# Altium PCB UZ_D_LEDebug.PcbDoc
Units mm, origin at the board's own origin, x right, y up, seen from the top; angles counter-clockwise.
Board outline 155.98 x 100 mm, 2 copper layers (Top Layer, Bottom Layer), stack 0.68 mm thick; 78 components, 87 nets, 255 pads, 99 vias.
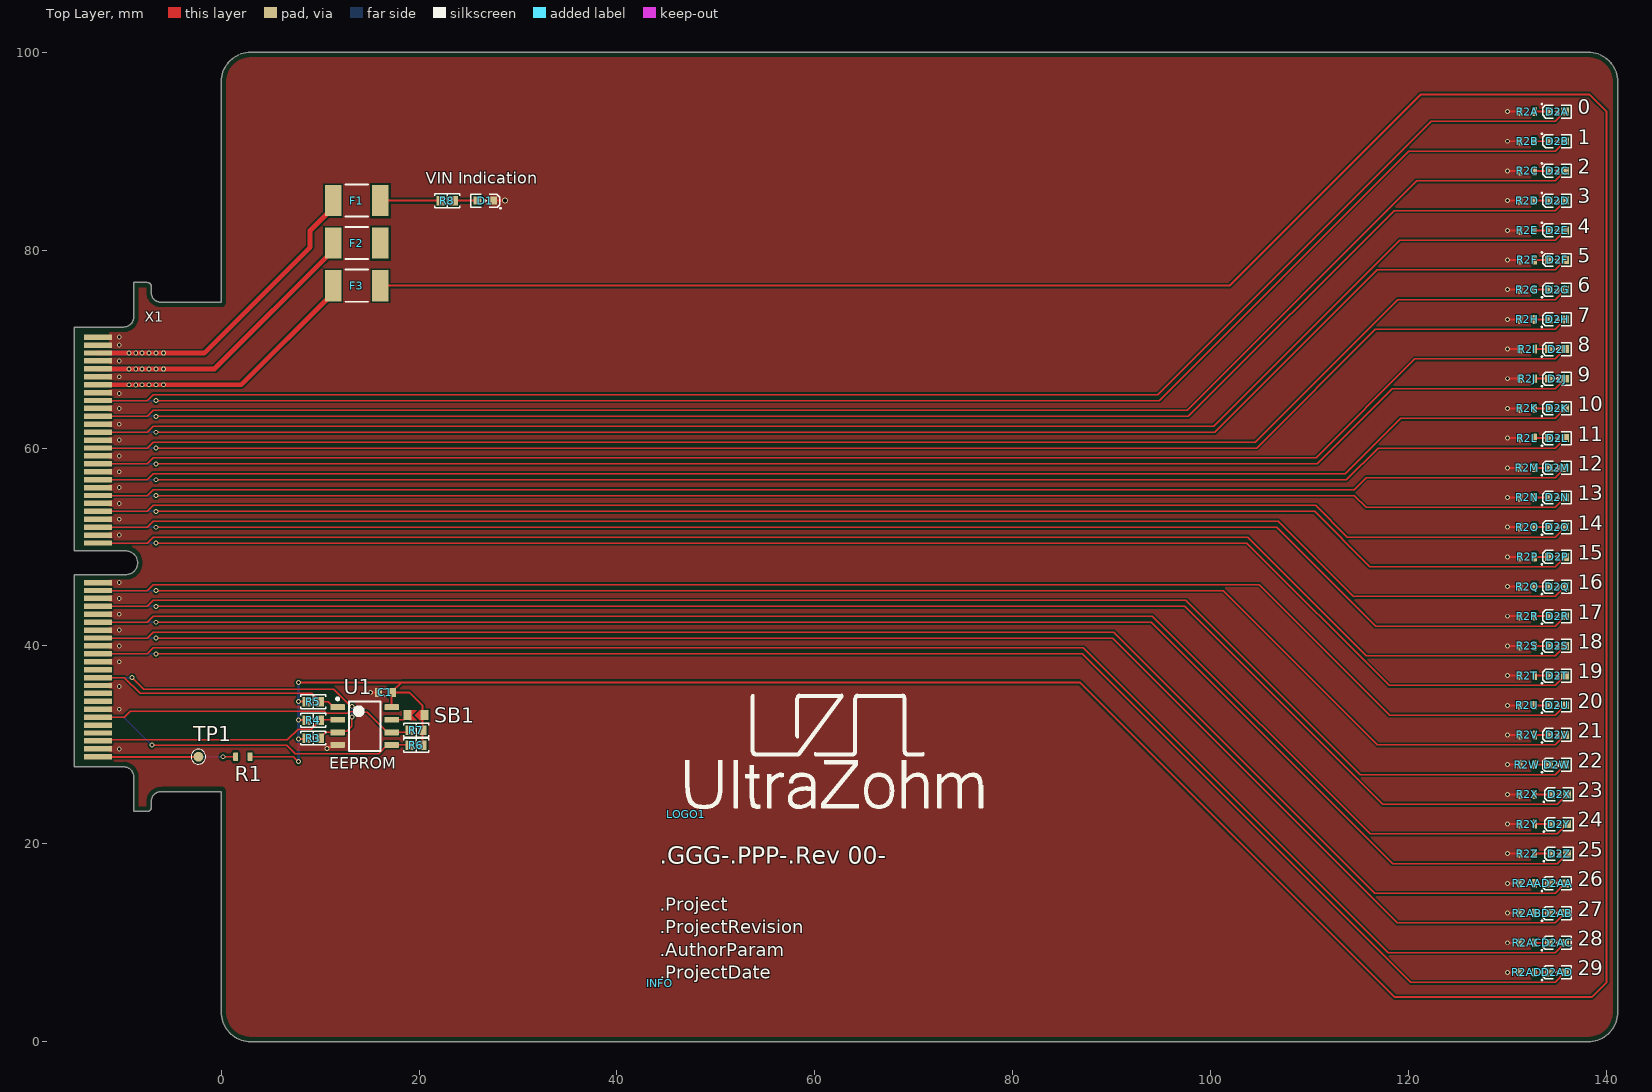
[diagram p0: Top Layer view]
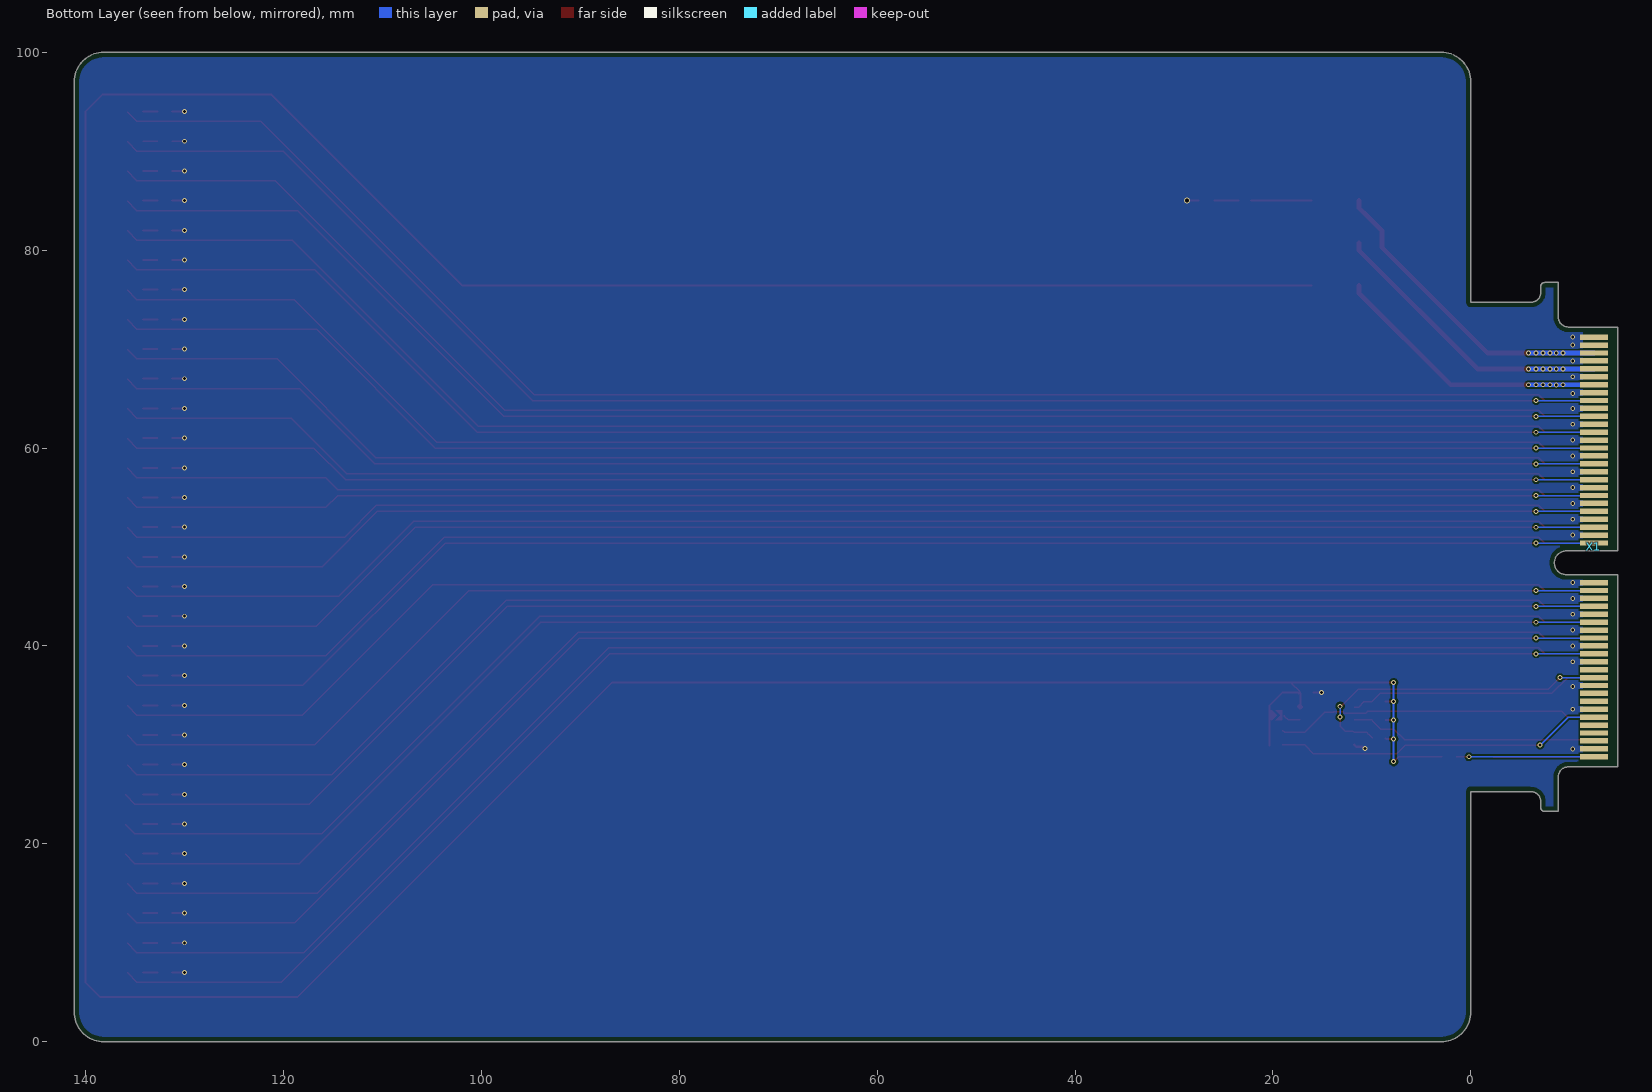
[diagram p1: Bottom Layer view, seen from below]
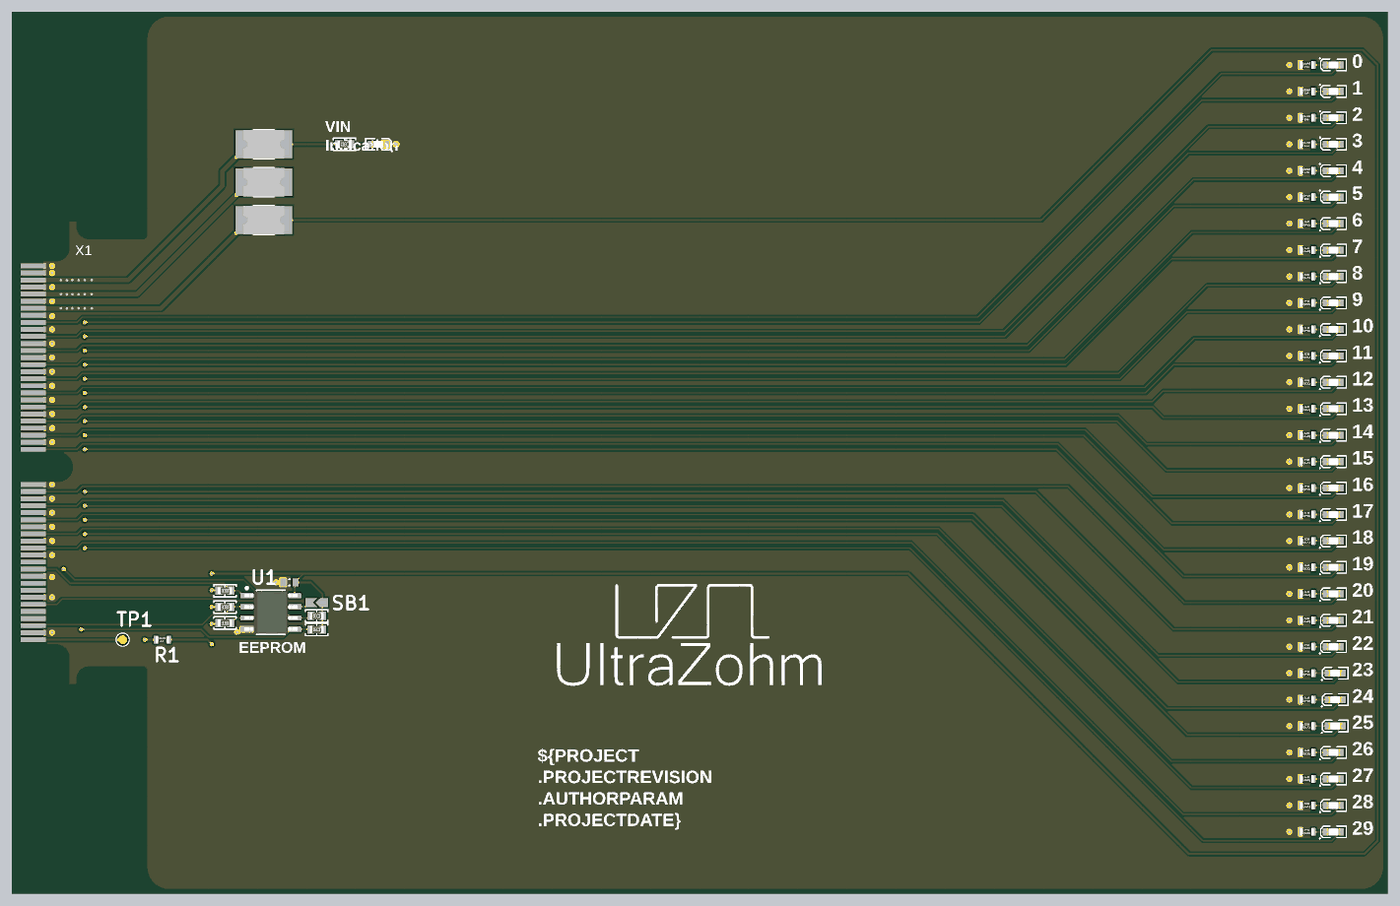
[diagram p2: 3D render of the assembled board from above, using the file's embedded part models]

## Layer stack, top to bottom
Top Solder: solder mask 0.01, Solder Resist, Dk 3.5
Top Layer: signal copper 0.035
Dielectric 2: prepreg 0.115, FR-4, Dk 4.4
Dielectric 1: core 0.38, Core-036, Dk 4.4
Dielectric 3: prepreg 0.115, FR-4, Dk 4.4
Bottom Layer: signal copper 0.035
Bottom Solder: solder mask 0.01, Solder Resist, Dk 3.5

## Board outline
-14.84,27.775 -9.84,27.775 cw(c-9.84,26.775) -8.84,26.775 -8.84,23.275 -7.46,23.275 ccw(c-7.46,23.675) -7.06,23.675 -7.06,24.275 cw(c-6.06,24.275) -6.06,25.275 0,25.275 0,3 ccw(c3,3) 3,0 138.141,0 ccw(c138.141,3) 141.141,3 141.141,97 ccw(c138.141,97) 138.141,100 3,100 ccw(c3,97) 0,97 0,74.725 -6.06,74.725 cw(c-6.06,75.725) -7.06,75.725 -7.06,76.325 ccw(c-7.46,76.325) -7.46,76.725 -8.84,76.725 -8.84,73.225 cw(c-9.84,73.225) -9.84,72.225 -14.84,72.225 -14.84,49.6 -9.64,49.6 cw(c-9.64,48.4) -9.64,47.2 -14.84,47.2

## Design rules (kind name [scope] priority, off if disabled: settings)
BoardOutlineClearance BoardOutlineClearance_TopOverlay [OnLayer('Top Overlay') or OnLayer('Bottom Overlay')] p1: gap=0 ignorepadtopadclearanceinfootprint=FALSE
BoardOutlineClearance [All] p2: gap=0.508 ignorepadtopadclearanceinfootprint=FALSE except(0: Arc-SplitContinuation Track-SplitContinuation SMDPad-SplitContinuation THPad-SplitContinuation Via-SplitContinuation Fill-SplitContinuation Poly-SplitContinuation Region-SplitContinuation Text-OutlineEdge Text-CavityEdge Text-CutoutEdge Text-SplitBarrior Text-SplitContinuation; 0.254: SMDPad-OutlineEdge SMDPad-CavityEdge SMDPad-CutoutEdge SMDPad-SplitBarrior)
Clearance [All] p1: gap=0.2 ignorepadtopadclearanceinfootprint=FALSE except(0: Arc-Text Track-Text SMDPad-Text THPad-Text Via-Text Fill-Text Poly-Text Region-Text Text-Text Text-Hole; 0.127: Arc-Arc Arc-Track Track-Track SMDPad-SMDPad; 0.5: THPad-THPad Via-Via)
ComponentClearance [All] p1: gap=0 collisioncheckmode=3 verticalgap=0 showdistances=FALSE
DiffPairsRouting [All] p1: maxlimit=0.127 minlimit=0.127 mostfreqgap=0.127 toplayer_minwidth=0.254 toplayer_maxwidth=0.254 toplayer_prefwidth=0.254 bottomlayer_minwidth=0.254 bottomlayer_maxwidth=0.254 bottomlayer_prefwidth=0.254 impedanceprofiledriven=TRUE impedanceprofileid={1E899714-F215-421E-BD83-15DB56C979E2} maxuncoupledlength=12.7
HoleSize [All] p1: absolutevalues=TRUE maxlimit=6.3 minlimit=0.2 maxpercent=80.000 minpercent=20.000
MatchedLengths [All] p1: tolerance=0.254 checknetsindiffpair=TRUE checkdiffpairvsdiffpair=FALSE checkxsignals=FALSE checkothers=FALSE
MinimumSolderMaskSliver [All] p1: minsoldermaskwidth=0.089
PlaneConnect [All] p1: pad.planeconnectstyle=Relief pad.reliefexpansion=0.508 pad.reliefentries=4 pad.reliefconductorwidth=0.254 pad.reliefairgap=0.254 via.planeconnectstyle=Direct via.reliefexpansion=0.508 via.reliefentries=4 via.reliefconductorwidth=0.254 via.reliefairgap=0.254
PolygonConnect PolygonConnect_GND [InNet('GND')] p1 off: thpad.connectstyle=Relief thpad.reliefconductorwidth=0.254 thpad.reliefentries=4 thpad.polygonreliefangle="90 Angle" thpad.airgapwidth=0.254 smdpad.connectstyle=Relief smdpad.reliefconductorwidth=0.254 smdpad.reliefentries=4 smdpad.polygonreliefangle="90 Angle" smdpad.airgapwidth=0.254 via.connectstyle=Direct via.reliefconductorwidth=0.254 via.reliefentries=4 via.polygonreliefangle="90 Angle" via.airgapwidth=0.254
PolygonConnect [All] p2: connectstyle=Direct reliefconductorwidth=0.254 reliefentries=4 polygonreliefangle="90 Angle" airgapwidth=0.127
RoomDefinition Component_LowerEdgeKeepOut [All] p1: confinementstyle=ConfineOut formatcopy=TRUE lockcomponents=FALSE outline 0,0 135.5,0 135.5,3 0,3
RoomDefinition Component_UpperEdgeKeepOut [All] p2: confinementstyle=ConfineOut formatcopy=TRUE lockcomponents=FALSE outline 0,97 135.5,97 135.5,100 0,100
RoutingVias [All] p1: holewidth=0.3 width=0.6 viastyle="Through Hole" minholewidth=0.2 minwidth=0.4 maxholewidth=0.8 maxwidth=1.6
SilkToSilkClearance [All] p1: silktosilkclearance=0
SilkToSolderMaskClearance [IsPad] p1: minsilkscreentomaskgap=0 clearancetoexposedcopper=TRUE
SolderMaskExpansion [All] p1: expansion=0.102 istentingtop=FALSE
SupplyNets "Schematic Supply Nets_6" [InNet('5V_PER')] p1: voltage=0.000
SupplyNets "Schematic Supply Nets_5" [InNet('5V')] p2: voltage=0.000
SupplyNets "Schematic Supply Nets_4" [InNet('3V3_PER')] p3: voltage=0.000
SupplyNets "Schematic Supply Nets_3" [InNet('GND')] p4: voltage=0.000
SupplyNets "Schematic Supply Nets_2" [InNet('VIN')] p5: voltage=0.000
SupplyNets "Schematic Supply Nets_1" [InNet('VIN_unfused')] p6: voltage=0.000
SupplyNets "Schematic Supply Nets" [InNet('3V3')] p7: voltage=0.000
Width width_s75 [InNetClass('S75')] p1 off: maxlimit=0.1 minlimit=0.1 preferedwidth=0.1 minimp=50.000000 maximp=50.000000 favimp=50.000000
Width [All] p2: maxlimit=10 minlimit=0.127 preferedwidth=0.254 minimp=50.000000 maximp=50.000000 favimp=50.000000
23 further rules are at their usual default settings.

## Classes and differential pairs
channel class LED: LEDA LEDAA LEDAB LEDAC LEDAD LEDB LEDC LEDD LEDE LEDF LEDG LEDH LEDI LEDJ LEDK LEDL LEDM LEDN LEDO LEDP LEDQ LEDR LEDS LEDT LEDU LEDV LEDW LEDX LEDY LEDZ
component class LEDZ: D2Z R2Z
component class LEDY: D2Y R2Y
component class LEDX: D2X R2X
component class LEDW: D2W R2W
component class LEDV: D2V R2V
component class LEDU: D2U R2U
component class LEDT: D2T R2T
component class LEDS: D2S R2S
component class LEDR: D2R R2R
component class LEDQ: D2Q R2Q
component class LEDP: D2P R2P
component class LEDO: D2O R2O
component class LEDN: D2N R2N
component class LEDM: D2M R2M
component class LEDL: D2L R2L
component class LEDK: D2K R2K
component class LEDJ: D2J R2J
component class LEDI: D2I R2I
component class LEDH: D2H R2H
component class LEDG: D2G R2G
component class LEDF: D2F R2F
component class LEDE: D2E R2E
component class LEDD: D2D R2D
component class LEDC: D2C R2C
component class LEDB: D2B R2B
component class LEDA: D2A R2A
component class LEDAD: D2AD R2AD
component class LEDAC: D2AC R2AC
component class LEDAB: D2AB R2AB
component class LEDAA: D2AA R2AA
component class X1: C1 D1 F1 F2 F3 R1 R3 R4 R5 R6 R7 R8 SB1 TP1 U1 X1

## Components (designator, comment, footprint, x,y, rotation, side; value= is the part's Value field where it differs from the comment)
C1 "100 nF" C_0603 16.6,35.297 r180 top
D1 "150060BS84000" WL-SMCW_0603 26.7,85 r180 top
D2A "LED Red" WL-SMCW_0603 135,94 r0 top (schematic designator D2)
D2AA "LED Red" WL-SMCW_0603 135,16 r0 top (schematic designator D2)
D2AB "LED Red" WL-SMCW_0603 135,13 r0 top (schematic designator D2)
D2AC "LED Red" WL-SMCW_0603 135,10 r0 top (schematic designator D2)
D2AD "LED Red" WL-SMCW_0603 135,7 r0 top (schematic designator D2)
D2B "LED Red" WL-SMCW_0603 135,91 r0 top (schematic designator D2)
D2C "LED Red" WL-SMCW_0603 135,88 r0 top (schematic designator D2)
D2D "LED Red" WL-SMCW_0603 135,85 r0 top (schematic designator D2)
D2E "LED Red" WL-SMCW_0603 135,82 r0 top (schematic designator D2)
D2F "LED Red" WL-SMCW_0603 135,79 r0 top (schematic designator D2)
D2G "LED Red" WL-SMCW_0603 135,76 r0 top (schematic designator D2)
D2H "LED Red" WL-SMCW_0603 135,73 r0 top (schematic designator D2)
D2I "LED Red" WL-SMCW_0603 135,70 r0 top (schematic designator D2)
D2J "LED Red" WL-SMCW_0603 135,67 r0 top (schematic designator D2)
D2K "LED Red" WL-SMCW_0603 135,64 r0 top (schematic designator D2)
D2L "LED Red" WL-SMCW_0603 135,61 r0 top (schematic designator D2)
D2M "LED Red" WL-SMCW_0603 135,58 r0 top (schematic designator D2)
D2N "LED Red" WL-SMCW_0603 135,55 r0 top (schematic designator D2)
D2O "LED Red" WL-SMCW_0603 135,52 r0 top (schematic designator D2)
D2P "LED Red" WL-SMCW_0603 135,49 r0 top (schematic designator D2)
D2Q "LED Red" WL-SMCW_0603 135,46 r0 top (schematic designator D2)
D2R "LED Red" WL-SMCW_0603 135,43 r0 top (schematic designator D2)
D2S "LED Red" WL-SMCW_0603 135,40 r0 top (schematic designator D2)
D2T "LED Red" WL-SMCW_0603 135,37 r0 top (schematic designator D2)
D2U "LED Red" WL-SMCW_0603 135,34 r0 top (schematic designator D2)
D2V "LED Red" WL-SMCW_0603 135,31 r0 top (schematic designator D2)
D2W "LED Red" WL-SMCW_0603 135,28 r0 top (schematic designator D2)
D2X "LED Red" WL-SMCW_0603 135.2,25 r0 top (schematic designator D2)
D2Y "LED Red" WL-SMCW_0603 135.2,22 r0 top (schematic designator D2)
D2Z "LED Red" WL-SMCW_0603 135.2,19 r0 top (schematic designator D2)
F1 "Littelfuse_PTC_1812" 1812_PTC_Polyfuse_Littelfuse 13.7,85 r0 top value="PTC, 1.1 A, 24V"
F2 "Littelfuse_PTC_1812" 1812_PTC_Polyfuse_Littelfuse 13.7,80.7 r0 top value="PTC, 1.1 A, 24V"
F3 "Littelfuse_PTC_1812" 1812_PTC_Polyfuse_Littelfuse 13.7,76.4 r0 top value="PTC, 1.1 A, 24V"
INFO "Design Information" Design_info 44.3,5.9 r0 top
LOGO1 "UZ Logo" UZ_Logo_small 47,23 r0 top
R1 "1k" R_0603_TE#1 2.2,28.8 r270 top
R2A "470R" R_0603_TE#1 132,94 r270 top (schematic designator R2)
R2AA "470R" R_0603_TE#2 132,16 r90 top (schematic designator R2)
R2AB "470R" R_0603_TE#2 132,13 r90 top (schematic designator R2)
R2AC "470R" R_0603_TE#2 132,10 r90 top (schematic designator R2)
R2AD "470R" R_0603_TE#2 132,7 r90 top (schematic designator R2)
R2B "470R" R_0603_TE#1 132,91 r270 top (schematic designator R2)
R2C "470R" R_0603_TE#1 132,88 r270 top (schematic designator R2)
R2D "470R" R_0603_TE#1 132,85 r270 top (schematic designator R2)
R2E "470R" R_0603_TE#1 132,82 r270 top (schematic designator R2)
R2F "470R" R_0603_TE#1 132,79 r270 top (schematic designator R2)
R2G "470R" R_0603_TE#2 132,76 r90 top (schematic designator R2)
R2H "470R" R_0603_TE#2 132,73 r90 top (schematic designator R2)
R2I "470R" R_0603_TE#2 132,70 r90 top (schematic designator R2)
R2J "470R" R_0603_TE#2 132,67 r90 top (schematic designator R2)
R2K "470R" R_0603_TE#2 132,64 r90 top (schematic designator R2)
R2L "470R" R_0603_TE#2 132,61 r90 top (schematic designator R2)
R2M "470R" R_0603_TE#2 132,58 r90 top (schematic designator R2)
R2N "470R" R_0603_TE#2 132,55 r90 top (schematic designator R2)
R2O "470R" R_0603_TE#2 132,52 r90 top (schematic designator R2)
R2P "470R" R_0603_TE#2 132,49 r90 top (schematic designator R2)
R2Q "470R" R_0603_TE#2 132,46 r90 top (schematic designator R2)
R2R "470R" R_0603_TE#2 132,43 r90 top (schematic designator R2)
R2S "470R" R_0603_TE#2 132,40 r90 top (schematic designator R2)
R2T "470R" R_0603_TE#2 132,37 r90 top (schematic designator R2)
R2U "470R" R_0603_TE#2 132,34 r90 top (schematic designator R2)
R2V "470R" R_0603_TE#2 132,31 r90 top (schematic designator R2)
R2W "470R" R_0603_TE#2 132,28 r90 top (schematic designator R2)
R2X "470R" R_0603_TE#2 132,25 r90 top (schematic designator R2)
R2Y "470R" R_0603_TE#2 132,22 r90 top (schematic designator R2)
R2Z "470R" R_0603_TE#2 132,19 r90 top (schematic designator R2)
R3 "4k7" "RES 0603_1608" 9.3,30.688 r180 top
R4 "4k7" "RES 0603_1608" 9.3,32.497 r180 top
R5 "4k7" "RES 0603_1608" 9.3,34.347 r180 top
R6 "100k" "RES 0603_1608" 19.7,29.958 r0 top
R7 "100k" "RES 0603_1608" 19.7,31.488 r0 top
R8 "24k9" "RES 0603_1608" 22.85,85 r180 top
SB1 "Solder Bump 0603" SB_0603 19.7,33.005 r0 top
TP1 "Testpoint 1mm" TP_1mm -2.3,28.8 r90 top
U1 "M24C02-WMN6TP" D0008A_N 14.5,31.9 r0 top
X1 "HSEC8-150-01-XX-DV-A-BL-CARD" HSEC8-150-01-XX-DV-A-BL-CARD -14.84,50 r270 bottom locked

## Footprints (in the part's own frame and the unit in brackets; to place one, negate y for a bottom-side part, rotate by r counter-clockwise, add the part's x,y. Pads: shape width x height; smd on the part's side, far side on the other; paste and mask are expansions set on the pad)
1812_PTC_Polyfuse_Littelfuse [mm] "Chip Fuse, 2-Leads, Body 4.6x3.24mm"
  rect 1.68x3.14 smd: 1(-2.39,0) 2(2.39,0)
  silkscreen extent -1.15,-1.62 1.15,1.62, body extent -2.3,-1.62 2.3,1.62, height 1.15
C_0603 [mm] "Chip Capacitor, Body 1.6x0.8mm, Height 1.0mm, IPC High Density"
  rect 0.7x0.9 smd: 1(-0.7,0) 2(0.7,0)
  silkscreen extent -0.05,-0.35 0.05,0.35, body extent -0.87,-0.47 0.88,0.48, height 1
D0008A_N [mm] "SOIC, 8-Leads, Body 5x4mm, Pitch 1.27mm, IPC Medium Density"
  rrect17% 1.45x0.6 smd: 1(-2.725,1.905) 2(-2.725,0.635) 3(-2.725,-0.635) 4(-2.725,-1.905) 5(2.725,-1.905) 6(2.725,-0.635) 7(2.725,0.635) 8(2.725,1.905)
  silkscreen extent -2.85,-2.5 1.6,2.88, body extent -3,-2.45 3,2.45, height 1.63
Design_info [mm] "Design information about the PCB"
HSEC8-150-01-XX-DV-A-BL-CARD [mm]
  rect 0.55x2.8 smd far side mask+0.05: 1(-21.2,-2.4) 3(-20.4,-2.4) 5(-19.6,-2.4) 7(-18.8,-2.4) 9(-18,-2.4) 11(-17.2,-2.4) 13(-16.4,-2.4) 15(-15.6,-2.4) 17(-14.8,-2.4) 19(-14,-2.4) 21(-13.2,-2.4) 23(-12.4,-2.4) 25(-11.6,-2.4) 27(-10.8,-2.4) 29(-10,-2.4) 31(-9.2,-2.4) 33(-8.4,-2.4) 35(-7.6,-2.4) 37(-6.8,-2.4) 39(-6,-2.4) 41(-5.2,-2.4) 43(-4.4,-2.4) 45(-3.6,-2.4) 47(-2.8,-2.4) 49(-2,-2.4) 51(-1.2,-2.4) 53(-0.4,-2.4) 55(3.6,-2.4) 57(4.4,-2.4) 59(5.2,-2.4) 61(6,-2.4) 63(6.8,-2.4) 65(7.6,-2.4) 67(8.4,-2.4) 69(9.2,-2.4) 71(10,-2.4) 73(10.8,-2.4) 75(11.6,-2.4) 77(12.4,-2.4) 79(13.2,-2.4) 81(14,-2.4) 83(14.8,-2.4) 85(15.6,-2.4) 87(16.4,-2.4) 89(17.2,-2.4) 91(18,-2.4) 93(18.8,-2.4) 95(19.6,-2.4) 97(20.4,-2.4) 99(21.2,-2.4)
  rect 0.55x2.8 smd mask+0.05: 2(-21.2,-2.4) 4(-20.4,-2.4) 6(-19.6,-2.4) 8(-18.8,-2.4) 10(-18,-2.4) 12(-17.2,-2.4) 14(-16.4,-2.4) 16(-15.6,-2.4) 18(-14.8,-2.4) 20(-14,-2.4) 22(-13.2,-2.4) 24(-12.4,-2.4) 26(-11.6,-2.4) 28(-10.8,-2.4) 30(-10,-2.4) 32(-9.2,-2.4) 34(-8.4,-2.4) 36(-7.6,-2.4) 38(-6.8,-2.4) 40(-6,-2.4) 42(-5.2,-2.4) 44(-4.4,-2.4) 46(-3.6,-2.4) 48(-2.8,-2.4) 50(-2,-2.4) 52(-1.2,-2.4) 54(-0.4,-2.4) 56(3.6,-2.4) 58(4.4,-2.4) 60(5.2,-2.4) 62(6,-2.4) 64(6.8,-2.4) 66(7.6,-2.4) 68(8.4,-2.4) 70(9.2,-2.4) 72(10,-2.4) 74(10.8,-2.4) 76(11.6,-2.4) 78(12.4,-2.4) 80(13.2,-2.4) 82(14,-2.4) 84(14.8,-2.4) 86(15.6,-2.4) 88(16.4,-2.4) 90(17.2,-2.4) 92(18,-2.4) 94(18.8,-2.4) 96(19.6,-2.4) 98(20.4,-2.4) 100(21.2,-2.4)
R_0603_TE#1 [mm] "Vishay D0603 1.55 x 0.85 (+0.1/-0.05) 0.3 +/- 0,2mm Kontakte"
  rrect33% 0.9x0.5 smd: 1(0,0.73) 2(0,-0.73)
  body extent -0.42,-0.78 0.43,0.77, height 0.45
R_0603_TE#2 [mm] "Vishay D0603 1.55 x 0.85 (+0.1/-0.05) 0.3 +/- 0,2mm Kontakte"
  rrect33% 0.9x0.5 smd: 1(0,-0.73) 2(0,0.73)
  body extent -0.42,-0.77 0.43,0.78, height 0.45
"RES 0603_1608" [mm] "Chip Resistor, 2-Leads, Body 1.60x0.80mm, IPC Medium Density"
  rect 0.85x0.95 smd: 1(-0.65,0) 2(0.65,0)
  silkscreen extent -1.27,-0.7 1.27,0.7, body extent -0.8,-0.4 0.8,0.4, height 0.45
SB_0603 [mil] "Solder Bump"
  rect 32x40 smd: 1(33.75,0) 2(-33.75,0)
  Top Layer region: -26.25,0 -17.25,0 2.75,-20 -26.25,-20
  Top Layer region: -26.25,0 -17.25,0 2.75,20 -26.25,20
  Top Layer region: 23.75,20 14.75,20 -5.25,0 14.75,-20 23.75,-20
TP_1mm [mm]
  round 1 smd paste-1: 1(0,0)
  silkscreen extent -0.75,-0.75 0.75,0.75
UZ_Logo_small [mm] "logo width 3cm"
  silkscreen extent -0.05,0.57 29.94,12.12
WL-SMCW_0603 [mm] "SMD Mono-color Chip LED, body 1.6x0.8mm"
  rect 0.8x0.8 smd: 1(-0.8,0) 2(0.8,0)
  silkscreen extent -1.59,-0.65 1.45,0.83, body extent -0.8,-0.4 0.8,0.4, height 0.7

## Part data
C1: library part C0603C104K9PACTU, "Capacitor 0603, 6.3 VDC, 100 nF, X5R", Device Package=0603, Manufacturer=KEMET, Operating Temperature="-55 - 85°C", Supplier Part Number 1=80-C0603C104K9P, Tolerance="10 %", Voltage Rating="6.3 VDC", Component Type="Capacitor 0603", ComponentLink1Description=Datasheet, ComponentLink1URL=https://www.mouser.de/datasheet/2/212/KEM_C1006_X5R_SMD-1103249.pdf, Created from=MGremer, Created On="20.12.2020 13:54:13", Last Updated="20.01.2021 13:57:36", Live Cycle Status=1, Manufacturer Part Number=C0603C104K9PACTU, Mounting Type=SMD, PartID=70, Series="SMD Comm X5R", Stock number="not stored", Supplier 1=Mouser, Type=Capacitor
D1: "WL-SMCW SMD Mono-color Chip LED Waterclear Blue", Color=blue, Device Package=0603, Forward Current I_f="20 mA", Forward Voltage U_f="3.2 V", Manufacturer="Wuerth Elektronik", Nominal Power="78 mW", Operating Temperature="-40 - 85 °C", Supplier Part Number 1=710-150060BS84000, Component Type="LED Diode", ComponentLink1Description=Datasheet, ComponentLink1URL=https://www.mouser.de/datasheet/2/445/150060BS84000-1838909.pdf, Created from=MGremer, Created On="08.12.2020 10:19:38", Last Updated="03.03.2021 09:59:51", Light Intensity="560 mcd", Live Cycle Status=1, Manufacturer Part Number=150060BS84000, Mounting Type=SMD, PartID=1, Stock number="not stored", Supplier 1=Mouser, Supplier 2=Farnell, Supplier 3=Digi-Key, Supplier Part Number 2=3408611, Supplier Part Number 3=732-150060BS84000CT-ND, Type=Standard, Wavelength="470 nm"
D2A D2AA D2AB D2AC D2AD D2B D2C D2D D2E D2F D2G D2H D2I D2J D2K D2L D2M D2N D2O D2P D2Q D2R D2S D2T D2U D2V D2W D2X D2Y D2Z: library part UZgen_LED_0603_Red, "Standard LEDs - SMD 0603 red", Color=red, Device Package=0603, Manufacturer=UZgen, Supplier Part Number 1='', Component Type="LED Diode", ComponentLink1Description=N/A, ComponentLink1URL=N/A, Created from=UZgenTool, Created On="09/09/2024 10:45:01", Last Updated="09/09/2024 10:45:01", Live Cycle Status=1, Manufacturer Part Number=UZgen_LED_0603_Red, Mounting Type=SMD, PartID=22, Stock number="not stored", Supplier 1=LCSC, Type=Standard
F1 F2 F3: "POLYSWITCH RESETTABLE DEVICES", Hold Current=1.1A, LCSC Part Number=C70119, Manufacturer=Littelfuse, MPN=miniASMDC110F/24, Nominal current="1 A", Operating Temperature="-40 - 85 °C", Package=1812, Resistance="0.18 Ohm", Supplier Part Number 1=530-0ZCG0150BF2C, Trip Current=2.2A, Voltage=24V, Component Type=Littelfuse_PTC_1812, ComponentLink1Description=Datasheet, ComponentLink1URL=https://www.littelfuse.com/~/media/electronics/datasheets/resettable_ptcs/littelfuse_ptc_surface_mount_catalog_datasheet.pdf.pdf, Created=2019_02_10_AGeiger, Created from=MHlatky, Created On="07.05.2021 06:50:33", Last Updated="27.05.2022 15:06:17", Live Cycle Status=1, Manufacturer Part Number=Littelfuse_PTC_1812, MF=Littelfuse, Mounting Type=SMD, PartID=5, Supplier 1=Mouser, Type=Fuse
INFO: library part Design_info
LOGO1: library part 1, "Official Project Logo of the UltraZohm", Manufacturer="PCB Manufacturer", Manufacturer Part Number="UltraZohm Logo", Component Type=Logo, ComponentLink1Description=Homepage, ComponentLink1URL=https://ultrazohm.com, Created from="T. Wendt", Created On="19.02.2021 16:55:56", Last Updated="02.03.2021 14:31:24", Live Cycle Status=1, PartID=1, Type="Standard (No BOM)"
R1: library part UZgen_R_0603_1k, "Generic resistor", Device Package=0603, Manufacturer=UZgen, Tolerance="1 %", Created from=UZgenTool, Created On="02.07.2024 17:29:49", Last Updated="02.07.2024 17:29:49", Manufacturer Part Number=UZgen_R_0603_1k, Mounting Type=SMD, PartID=221
R2A R2AA R2AB R2AC R2AD R2B R2C R2D R2E R2F R2G R2H R2I R2J R2K R2L R2M R2N R2O R2P R2Q R2R R2S R2T R2U R2V R2W R2X R2Y R2Z: library part UZgen_R_0603_470R, "Generic resistor", Device Package=0603, Manufacturer=UZgen, Tolerance="1 %", Created from=UZgenTool, Created On="02.07.2024 17:29:49", Last Updated="02.07.2024 17:29:49", Manufacturer Part Number=UZgen_R_0603_470R, Mounting Type=SMD, PartID=213
R3 R4 R5: library part 0603WAF4701T5E, "SMD resistor E24 series", Device Package=0603, LCSC Part Number=C23162, Manufacturer=UNI-ROYAL, Tolerance=1%, Component Type="SMD resistor", ComponentLink1Description=Datasheet, ComponentLink1URL=https://datasheet.lcsc.com/lcsc/2206010116_UNI-ROYAL-Uniroyal-Elec-0603WAF4701T5E_C23162.pdf, Created from=AGeiger, Created On="14.12.2020 16:17:14", Last Updated="25.08.2022 20:03:04", Live Cycle Status=1, Manufacturer Part Number=0603WAF4701T5E, Mounting Type=SMD, PartID=90, Stock number="Labor SMD Container", Supplier 1=LCSC, Supplier Part Number 1=C23162, Type=Resistor
R6 R7: library part RK73B1JTTD104J, "SMD resistor E24 series", Device Package=0603, LCSC Part Number=C25803, Manufacturer="KOA Speer", Supplier Part Number 1=660-RK73B1JTTD104J, Tolerance=5%, Component Type="SMD resistor", ComponentLink1Description=Datasheet, ComponentLink1URL=https://www.mouser.de/datasheet/2/219/RK73B-1825463.pdf, Created from=MGremer, Created On="14.12.2020 16:17:14", Last Updated="27.05.2022 14:04:10", Live Cycle Status=1, Manufacturer Part Number=RK73B1JTTD104J, Mounting Type=SMD, PartID=122, Stock number="Labor SMD Container", Supplier 1=Mouser, Type=Resistor
R8: library part CRCW060324K9FKEA, "SMD resistor 1%", Device Package=0603, Manufacturer=Vishay, Supplier Part Number 1=71-CRCW0603-24.9K-E3, Tolerance=1%, Component Type="SMD resistor", ComponentLink1Description=Datasheet, ComponentLink1URL=https://www.mouser.de/datasheet/2/427/dcrcwe3-1762152.pdf, Created from=MGremer, Created On="14.12.2020 16:17:14", Last Updated="02.03.2021 14:07:32", Live Cycle Status=1, Manufacturer Part Number=CRCW060324K9FKEA, Mounting Type=SMD, PartID=157, Stock number="not stored", Supplier 1=Mouser, Type=Resistor
SB1: library part =Value, Device Package=0603, Component Type="Solder Bump", Created from=AGeiger, Created On="09.01.2024 17:13:56", Last Updated="09.01.2024 17:13:56", Manufacturer Part Number="Solder Bump 0603", Mounting Type=SMD, PartID=1, Revision="July-2002: Re-released for DXP Platform."
TP1: library part NULL, Component Type=Testpoint, Created=2018_06_25_AGeiger, Created from=AGeiger, Created On="20.09.2022 13:14:57", Last Updated="20.09.2022 13:15:39", Live Cycle Status=1, Manufacturer=NULL, Manufacturer Part Number=NULL, PartID=9, Supplier 1=NULL, Supplier Part Number 1=NULL, Type=Testpoint
U1: "2Kbit I2C SOP-8 EEPROM ROHS", Device Package=SOIC-8, LCSC Part Number=C7562, Manufacturer=STMicroelectronics, Operating Temperature="-40 to +85 °C", Supplier Part Number 1=511-M24C02-WMN6TP, Component Type=EEPROM, ComponentLink1Description=Datasheet, ComponentLink1URL=https://www.st.com/resource/en/datasheet/m24c01-w.pdf, Created from=AGeiger, Created On="19.11.2023 14:54:27", Last Updated="19.11.2023 21:39:04", Manufacturer Part Number=M24C02-WMN6TP, Mounting Type=SMD, PartID=1, Series=M24xxx, Supplier 1=Mouser, Supplier 2=LCSC, Supplier Part Number 2=C7562, Type=Memory
X1: "Mating Card Layout for HSEC8-150-01-XX-DV-A-BL", Manufacturer=SAMTEC, Created=2018_04_23_AGeiger

## Via types
v1: diameter 0.5, hole 0.3, Top Layer to Bottom Layer, 80 vias
v2: diameter 0.5, hole 0.3, Top Layer to Bottom Layer, tented both sides, 18 vias
v3: diameter 0.6, hole 0.4, Top Layer to Bottom Layer, 1 vias

## Nets (pads, with @x,y where several pads share a name; then routed paths per layer and width w, separated by ;. In a path a pad name is that pad's centre, name@x,y a point inside that pad or via, vN(x,y) a via of type N, cw(c..) or ccw(c..) an arc to the next point about the centre after c; other vN are vias at no path point)
3V3: C1.1 F3.2 R1.1 R3.2 R4.2 R5.2 R6.2 R7.2 SB1.1 U1.8 | length 393.3
  Top Layer w0.2: R1.1 7.3,28.8 v1(7.8,28.3) ; v1(7.8,30.6) 8.562,30.6 R3.2 ; v1(7.8,32.5) 8.647,32.5 R4.2 ; v1(7.8,34.4) 8.597,34.4 R5.2 ; v1(7.8,36.3) 18.203,36.3 ; F3.2 101.9,76.4 121.2,95.7 138.3,95.7 140,94 140,6 138.5,4.5 118.6,4.5 86.8,36.3 18.203,36.3 ; U1.8 17.225,35.222 C1.1 ; C1.1@17.397,35.2 C1.1@17.397,35.297 ; C1.1@17.397,35.3 C1.1@17.397,35.297 ; 18.5,36.3 18.203,36.3 ; R6.2 20.35,33.95 19.003,35.297 C1.1@17.397,35.297 ; C1.1 17.3,35.397 18.203,36.3 ; C1.1 C1.1@17.397,35.297
  Top Layer w0.5: U1.8 17.25,33.805 U1.8@17.3,33.855
  Bottom Layer w0.2: v1(7.8,28.3) v1(7.8,30.6) v1(7.8,32.5) v1(7.8,34.4) v1(7.8,36.3)
3V3_PER: F3.1 X1.13 X1.14 | length 35
  Top Layer w0.5: X1.13@-12.44,66.391 v2(-9.306,66.391) v2(-8.006,66.391) v2(-7.306,66.391) v2(-6.606,66.391) v2(-5.806,66.391) 2.031,66.391 11.31,75.67 F3.1
  Bottom Layer w0.5: X1.14@-12.44,66.391 v2(-9.306,66.391) v2(-8.006,66.391) v2(-7.306,66.391) v2(-6.606,66.391) v2(-5.806,66.391)
  other v2: -8.63,66.382
5V: F2.2
5V_PER: F2.1 X1.9 X1.10 | length 36.1
  Top Layer w0.5: X1.9@-12.44,67.991 v2(-9.306,67.991) v2(-8.006,67.991) v2(-7.306,67.991) v2(-6.606,67.991) v2(-5.806,67.991) -0.669,67.991 11.31,79.97 F2.1
  Bottom Layer w0.5: X1.10@-12.44,67.991 v2(-9.306,67.991) v2(-8.006,67.991) v2(-7.306,67.991) v2(-6.606,67.991) v2(-5.806,67.991)
  other v2: -8.63,67.982
AdapterCardOK: R1.2 X1.100 | length 13.9
  Top Layer w0.2: v1(0.2,28.8) R1.2
  Bottom Layer w0.2: X1.100@-12.436,28.796 -12.431,28.8 v1(0.2,28.8)
ADDR_0: R5.1 U1.1 X1.79 | length 25.5
  Top Layer w0.15: X1.79@-12.44,36.791 -9.791,36.791 -8.2,35.2 9.147,35.2 9.95,34.397 R5.1 10.808,34.347 11.35,33.805 U1.1
ADDR_1: R4.1 U1.2 X1.95 | length 25.1
  Top Layer w0.15: X1.95@-12.44,30.391 -12.331,30.5 6.7,30.5 7.8,31.6 9.103,31.6 9.95,32.447 R4.1 9.988,32.535 U1.2
ADDR_2: R3.1 U1.3 X1.80 | length 32.6
  Top Layer w0.15: v1(-9,36.8) -7.8,35.6 11.4,35.6 13.1,33.9 v1(13.2,33.9) ; R3.1 9.95,30.738 10.3,31.088 10.35,31.088 10.527,31.265 U1.3 11.91,31.4 12.7,31.4 13.2,31.9 v1(13.2,32.8)
  Bottom Layer w0.15: X1.80@-12.44,36.791 -12.431,36.8 v1(-9,36.8) ; v1(13.2,32.8) v1(13.2,33.9)
CarrierReady: TP1.1 X1.99 | length 10.1
  Top Layer w0.2: X1.99@-12.44,28.791 TP1.1@-2.3,28.791
Collective_FLT: X1.96
CPLD_DigIn_01: X1.83
CPLD_DigIn_02: X1.85
CPLD_DigOut_01: X1.84
CPLD_DigOut_02: X1.86
DIG_IO_00: D2A.2 X1.17 | length 160.3
  Top Layer w0.15: X1.17@-12.44,64.791 -7.473,64.791 -6.864,65.4 94.67,65.4 122.27,93 134.8,93 D2A.2
DIG_IO_01: D2B.2 X1.18 | length 159.1
  Top Layer w0.15: v1(-6.606,64.791) 94.811,64.791 120.02,90 134.8,90 D2B.2
  Bottom Layer w0.15: X1.18@-12.44,64.791 v1(-6.606,64.791)
DIG_IO_02: D2C.2 X1.21 | length 158.5
  Top Layer w0.15: X1.21@-12.44,63.191 -7.473,63.191 -6.864,63.8 97.64,63.8 120.84,87 134.8,87 D2C.2
DIG_IO_03: D2D.2 X1.22 | length 157.3
  Top Layer w0.15: v1(-6.606,63.191) 97.751,63.191 118.56,84 134.8,84 D2D.2
  Bottom Layer w0.15: X1.22@-12.44,63.191 v1(-6.606,63.191)
DIG_IO_04: D2E.2 X1.25 | length 156.7
  Top Layer w0.15: X1.25@-12.44,61.591 -7.473,61.591 -6.864,62.2 100.32,62.2 119.12,81 134.8,81 D2E.2
DIG_IO_05: D2F.2 X1.26 | length 155.5
  Top Layer w0.15: v1(-6.606,61.591) 100.431,61.591 116.84,78 134.8,78 D2F.2
  Bottom Layer w0.15: X1.26@-12.44,61.591 v1(-6.606,61.591)
DIG_IO_06: D2G.2 X1.29 | length 154.9
  Top Layer w0.15: X1.29@-12.44,59.991 -7.473,59.991 -6.864,60.6 104.52,60.6 118.92,75 134.8,75 D2G.2
DIG_IO_07: D2H.2 X1.30 | length 153.6
  Top Layer w0.15: v1(-6.606,59.991) 104.631,59.991 116.64,72 134.8,72 D2H.2
  Bottom Layer w0.15: X1.30@-12.44,59.991 v1(-6.606,59.991)
DIG_IO_08: D2I.2 X1.33 | length 153
  Top Layer w0.15: X1.33@-12.44,58.391 -7.473,58.391 -6.864,59 110.645,59 120.645,69 134.8,69 D2I.2
DIG_IO_09: D2J.2 X1.34 | length 151.8
  Top Layer w0.15: v1(-6.606,58.391) 110.756,58.391 118.365,66 134.8,66 D2J.2
  Bottom Layer w0.15: X1.34@-12.44,58.391 v1(-6.606,58.391)
DIG_IO_10: D2K.2 X1.37 | length 151.2
  Top Layer w0.15: X1.37@-12.44,56.791 -7.473,56.791 -6.864,57.4 113.6,57.4 119.2,63 134.8,63 D2K.2
DIG_IO_11: D2L.2 X1.38 | length 150
  Top Layer w0.15: v1(-6.606,56.791) 113.711,56.791 116.92,60 134.8,60 D2L.2
  Bottom Layer w0.15: X1.38@-12.44,56.791 v1(-6.606,56.791)
DIG_IO_12: D2M.2 X1.41 | length 149.4
  Top Layer w0.15: X1.41@-12.44,55.191 -7.473,55.191 -6.864,55.8 114.5,55.8 115.7,57 134.8,57 D2M.2
DIG_IO_13: D2N.2 X1.42 | length 149.1
  Top Layer w0.15: v1(-6.606,55.191) 114.522,55.191 115.713,54 134.8,54 D2N.2
  Bottom Layer w0.15: X1.42@-12.44,55.191 v1(-6.606,55.191)
DIG_IO_14: D2O.2 X1.45 | length 150.2
  Top Layer w0.15: X1.45@-12.44,53.591 -7.473,53.591 -6.864,54.2 110.6,54.2 113.8,51 134.8,51 D2O.2
DIG_IO_15: D2P.2 X1.46 | length 151
  Top Layer w0.15: v1(-6.606,53.591) 110.489,53.591 116.08,48 134.8,48 D2P.2
  Bottom Layer w0.15: X1.46@-12.44,53.591 v1(-6.606,53.591)
DIG_IO_16: D2Q.2 X1.49 | length 152.1
  Top Layer w0.15: X1.49@-12.44,51.991 -7.473,51.991 -6.864,52.6 106.805,52.6 114.405,45 134.8,45 D2Q.2
DIG_IO_17: D2R.2 X1.50 | length 152.8
  Top Layer w0.15: v1(-6.606,51.991) 106.694,51.991 116.685,42 134.8,42 D2R.2
  Bottom Layer w0.15: X1.50@-12.44,51.991 v1(-6.606,51.991)
DIG_IO_18: D2S.2 X1.53 | length 153.9
  Top Layer w0.15: X1.53@-12.44,50.391 -7.473,50.391 -6.864,51 103.743,51 115.743,39 134.8,39 D2S.2
DIG_IO_19: D2T.2 X1.54 | length 154.6
  Top Layer w0.15: v1(-6.606,50.391) 103.632,50.391 118.023,36 134.8,36 D2T.2
  Bottom Layer w0.15: X1.54@-12.44,50.391 v1(-6.606,50.391)
DIG_IO_20: D2U.2 X1.57 | length 154.4
  Top Layer w0.15: X1.57@-12.44,45.591 -7.473,45.591 -6.864,46.2 104.903,46.2 118.103,33 134.8,33 D2U.2
DIG_IO_21: D2V.2 X1.58 | length 155.1
  Top Layer w0.15: v1(-6.606,45.591) 101.262,45.591 116.853,30 134.8,30 D2V.2
  Bottom Layer w0.15: X1.58@-12.44,45.591 v1(-6.606,45.591)
DIG_IO_22: D2W.2 X1.61 | length 156.2
  Top Layer w0.15: X1.61@-12.44,43.991 -7.473,43.991 -6.864,44.6 97.5,44.6 115.1,27 134.8,27 D2W.2
DIG_IO_23: D2X.2 X1.62 | length 157.1
  Top Layer w0.15: v1(-6.606,43.991) 97.389,43.991 117.38,24 135,24 D2X.2
  Bottom Layer w0.15: X1.62@-12.44,43.991 v1(-6.606,43.991)
DIG_IO_24: D2Y.2 X1.65 | length 158.2
  Top Layer w0.15: X1.65@-12.44,42.391 -7.473,42.391 -6.864,43 94.11,43 116.11,21 135,21 D2Y.2
DIG_IO_25: D2Z.2 X1.66 | length 159
  Top Layer w0.15: v1(-6.606,42.391) 93.999,42.391 118.39,18 135,18 D2Z.2
  Bottom Layer w0.15: X1.66@-12.44,42.391 v1(-6.606,42.391)
DIG_IO_26: D2AA.2 X1.69 | length 159.8
  Top Layer w0.15: X1.69@-12.44,40.791 -7.473,40.791 -6.864,41.4 90.191,41.4 116.591,15 134.8,15 D2AA.2
DIG_IO_27: D2AB.2 X1.70 | length 160.6
  Top Layer w0.15: v1(-6.606,40.791) 90.08,40.791 118.871,12 134.8,12 D2AB.2
  Bottom Layer w0.15: X1.70@-12.44,40.791 v1(-6.606,40.791)
DIG_IO_28: D2AC.2 X1.73 | length 161.7
  Top Layer w0.15: X1.73@-12.44,39.191 -7.473,39.191 -6.864,39.8 87.122,39.8 117.922,9 134.8,9 D2AC.2
DIG_IO_29: D2AD.2 X1.74 | length 162.4
  Top Layer w0.15: v1(-6.606,39.191) 87.011,39.191 120.202,6 134.8,6 D2AD.2
  Bottom Layer w0.15: X1.74@-12.44,39.191 v1(-6.606,39.191)
DIG_Res_00: X1.78
DIG_Res_03: X1.91
DIG_Res_04: X1.92
DIG_Res_05: X1.93
DIG_Res_06: X1.94
DIG_Res_08: X1.77
GND: C1.2 D1.1 R2A.2 R2AA.2 R2AB.2 R2AC.2 R2AD.2 R2B.2 R2C.2 R2D.2 R2E.2 R2F.2 R2G.2 R2H.2 R2I.2 R2J.2 R2K.2 R2L.2 R2M.2 R2N.2 R2O.2 R2P.2 R2Q.2 R2R.2 R2S.2 R2T.2 R2U.2 R2V.2 R2W.2 R2X.2 R2Y.2 R2Z.2 U1.4 X1.1 X1.2 X1.3 X1.4 X1.7 X1.8 X1.11 X1.12 X1.15 X1.16 X1.19 X1.20 X1.23 X1.24 X1.27 X1.28 X1.31 X1.32 X1.35 X1.36 X1.39 X1.40 X1.43 X1.44 X1.47 X1.48 X1.51 X1.52 X1.55 X1.56 X1.59 X1.60 X1.63 X1.64 X1.67 X1.68 X1.71 X1.72 X1.75 X1.76 X1.81 X1.82 X1.87 X1.88 X1.97 X1.98 | length 41.3
  Top Layer w0.2: v1(15.1,35.3) 15.897,35.3 C1.2 ; D1.1 v3(28.7,85) ; v1(130,7) R2AD.2 ; v1(130,10) R2AC.2 ; v1(130,13) R2AB.2 ; v1(130,16) R2AA.2 ; v1(130,19) R2Z.2 ; v1(130,22) R2Y.2 ; v1(130,25) R2X.2 ; v1(130,28) R2W.2 ; v1(130,31) R2V.2 ; v1(130,34) R2U.2 ; v1(130,37) R2T.2 ; v1(130,40) R2S.2 ; v1(130,43) R2R.2 ; v1(130,46) R2Q.2 ; v1(130,49) R2P.2 ; v1(130,52) R2O.2 ; v1(130,55) R2N.2 ; v1(130,58) R2M.2 ; v1(130,61) R2L.2 ; v1(130,64) R2K.2 ; v1(130,67) R2J.2 ; v1(130,70) R2I.2 ; v1(130,73) R2H.2 ; v1(130,76) R2G.2 ; v1(130,79) R2F.2 ; v1(130,82) R2E.2 ; v1(130,85) R2D.2 ; v1(130,88) R2C.2 ; v1(130,91) R2B.2 ; v1(130,94) R2A.2
  Top Layer w0.254: v1(10.686,29.642) 10.752,29.642 10.932,29.822 11.602,29.822 U1.4
  other v1: -10.3,29.6 -10.3,33.6 -10.3,35.9 -10.3,38.4 -10.3,40 -10.3,41.6 -10.3,43.2 -10.3,44.8 -10.3,46.4 -10.3,51.2 -10.3,52.8 -10.3,54.4 -10.3,56 -10.3,57.6 -10.3,59.2 -10.3,60.8 -10.3,62.4 -10.3,64 -10.3,65.5 -10.3,67.2 -10.3,68.8 -10.3,70.4 -10.3,71.2
I2C0_SCL: R7.1 U1.6 X1.89 | length 32.8
  Top Layer w0.15: X1.89@-12.44,32.791 -9.809,32.791 -9.2,33.4 10.4,33.4 10.6,33.2 12.768,33.2 12.893,33.325 13.861,33.325 13.886,33.3 14.765,33.3 16.8,31.265 U1.6 18.827,31.265 R7.1
I2C0_SDA: R6.1 U1.5 X1.90 | length 33.4
  Top Layer w0.15: v1(-7,29.966) 6.634,29.966 7.5,29.1 15.905,29.1 16.8,29.995 U1.5 19.013,29.995 R6.1
  Bottom Layer w0.15: X1.90@-12.44,32.791 -9.825,32.791 v1(-7,29.966)
NetD1_2: D1.2 R8.1 | length 2.4
  Top Layer w0.2: R8.1 D1.2
NetD2A_1: D2A.1 R2A.1 | length 1.5
  Top Layer w0.2: R2A.1 D2A.1
NetD2AA_1: D2AA.1 R2AA.1 | length 1.5
  Top Layer w0.2: R2AA.1 D2AA.1
NetD2AB_1: D2AB.1 R2AB.1 | length 1.5
  Top Layer w0.2: R2AB.1 D2AB.1
NetD2AC_1: D2AC.1 R2AC.1 | length 1.5
  Top Layer w0.2: R2AC.1 D2AC.1
NetD2AD_1: D2AD.1 R2AD.1 | length 1.5
  Top Layer w0.2: R2AD.1 D2AD.1
NetD2B_1: D2B.1 R2B.1 | length 1.5
  Top Layer w0.2: R2B.1 D2B.1
NetD2C_1: D2C.1 R2C.1 | length 1.5
  Top Layer w0.2: R2C.1 D2C.1
NetD2D_1: D2D.1 R2D.1 | length 1.5
  Top Layer w0.2: R2D.1 D2D.1
NetD2E_1: D2E.1 R2E.1 | length 1.5
  Top Layer w0.2: R2E.1 D2E.1
NetD2F_1: D2F.1 R2F.1 | length 1.5
  Top Layer w0.2: R2F.1 D2F.1
NetD2G_1: D2G.1 R2G.1 | length 1.5
  Top Layer w0.2: R2G.1 D2G.1
NetD2H_1: D2H.1 R2H.1 | length 1.5
  Top Layer w0.2: R2H.1 D2H.1
NetD2I_1: D2I.1 R2I.1 | length 1.5
  Top Layer w0.2: R2I.1 D2I.1
NetD2J_1: D2J.1 R2J.1 | length 1.5
  Top Layer w0.2: R2J.1 D2J.1
NetD2K_1: D2K.1 R2K.1 | length 1.5
  Top Layer w0.2: R2K.1 D2K.1
NetD2L_1: D2L.1 R2L.1 | length 1.5
  Top Layer w0.2: R2L.1 D2L.1
NetD2M_1: D2M.1 R2M.1 | length 1.5
  Top Layer w0.2: R2M.1 D2M.1
NetD2N_1: D2N.1 R2N.1 | length 1.5
  Top Layer w0.2: R2N.1 D2N.1
NetD2O_1: D2O.1 R2O.1 | length 1.5
  Top Layer w0.2: R2O.1 D2O.1
NetD2P_1: D2P.1 R2P.1 | length 1.5
  Top Layer w0.2: R2P.1 D2P.1
NetD2Q_1: D2Q.1 R2Q.1 | length 1.5
  Top Layer w0.2: R2Q.1 D2Q.1
NetD2R_1: D2R.1 R2R.1 | length 1.5
  Top Layer w0.2: R2R.1 D2R.1
NetD2S_1: D2S.1 R2S.1 | length 1.5
  Top Layer w0.2: R2S.1 D2S.1
NetD2T_1: D2T.1 R2T.1 | length 1.5
  Top Layer w0.2: R2T.1 D2T.1
NetD2U_1: D2U.1 R2U.1 | length 1.5
  Top Layer w0.2: R2U.1 D2U.1
NetD2V_1: D2V.1 R2V.1 | length 1.5
  Top Layer w0.2: R2V.1 D2V.1
NetD2W_1: D2W.1 R2W.1 | length 1.5
  Top Layer w0.2: R2W.1 D2W.1
NetD2X_1: D2X.1 R2X.1 | length 1.5
  Top Layer w0.2: R2X.1 D2X.1@134.2,25
NetD2Y_1: D2Y.1 R2Y.1 | length 1.5
  Top Layer w0.2: R2Y.1 D2Y.1@134.2,22
NetD2Z_1: D2Z.1 R2Z.1 | length 1.5
  Top Layer w0.2: R2Z.1 D2Z.1@134.2,19
NetSB1_2: SB1.2 U1.7 | length 1.9
  Top Layer w0.15: U1.7 18.474,32.535 18.843,32.904 SB1.2
VIN: F1.2 R8.2 | length 6.1
  Top Layer w0.2: F1.2@16.1,85 R8.2
VIN_unfused: F1.1 X1.5 X1.6 | length 38.2
  Top Layer w0.5: X1.5@-12.44,69.591 v2(-9.306,69.591) v2(-8.006,69.591) v2(-7.306,69.591) v2(-6.606,69.591) v2(-5.806,69.591) -1.709,69.591 9,80.3 9,81.98 10.7,83.68 10.72,83.68 11.31,84.27 F1.1
  Bottom Layer w0.5: X1.6@-12.44,69.591 v2(-9.306,69.591) v2(-8.006,69.591) v2(-7.306,69.591) v2(-6.606,69.591) v2(-5.806,69.591)
  other v2: -8.63,69.582

## Polygon pours and split planes (outlines as drawn)
GND on Top Layer "GND_Plane_L01" (solid, remove dead copper, pour order 0): -14.853,27.775 -9.853,27.775 cw(c-9.853,26.775) -8.853,26.775 -8.853,23.275 -7.473,23.275 ccw(c-7.473,23.675) -7.073,23.675 -7.073,24.275 cw(c-6.073,24.275) -6.073,25.275 0,25.275 0,3 ccw(c3,3) 3,0 138.141,0 ccw(c138.141,3) 141.141,3 141.141,97 141.141,97.01 ccw(c138.141,97.01) 138.141,100.01 3,100 ccw(c3,97) 0,97 0,74.725 -6.073,74.725 cw(c-6.073,75.725) -7.073,75.725 -7.073,76.325 ccw(c-7.473,76.325) -7.473,76.725 -8.853,76.725 -8.853,73.225 cw(c-9.853,73.225) -9.853,72.225 -14.853,72.225 -14.853,49.6 -9.653,49.6 cw(c-9.653,48.4) -9.653,47.2 -14.853,47.2
GND on Bottom Layer "GND_Plane_L02" (solid, remove dead copper, pour order 1): -14.853,27.775 -9.853,27.775 cw(c-9.853,26.775) -8.853,26.775 -8.853,23.275 -7.473,23.275 ccw(c-7.473,23.675) -7.073,23.675 -7.073,24.275 cw(c-6.073,24.275) -6.073,25.275 0,25.275 0,3 ccw(c3,3) 3,0 138.141,0 ccw(c138.141,3) 141.141,3 141.141,97 141.141,97.01 ccw(c138.141,97.01) 138.141,100.01 3,100 ccw(c3,97) 0,97 0,74.725 -6.073,74.725 cw(c-6.073,75.725) -7.073,75.725 -7.073,76.325 ccw(c-7.473,76.325) -7.473,76.725 -8.853,76.725 -8.853,73.225 cw(c-9.853,73.225) -9.853,72.225 -14.853,72.225 -14.853,49.6 -9.653,49.6 cw(c-9.653,48.4) -9.653,47.2 -14.853,47.2

## Other copper
Top Layer:
  pour cut-out: -14.853,47.2 -11.3,47.2 -11.3,27.775 -14.853,27.775
  pour cut-out: -14.853,72.225 -11.3,72.225 -11.3,49.6 -14.853,49.6
Bottom Layer:
  pour cut-out: -14.853,47.2 -11.3,47.2 -11.3,27.775 -14.853,27.775
  pour cut-out: -14.853,72.225 -11.3,72.225 -11.3,49.6 -14.853,49.6

## Silkscreen, mask and mechanical layers (free items; w line width, h text height)
Top Overlay:
  text "0" at 137.1,93.21 h2.5
  text "1" at 137.1,90.195 h2.5
  text "2" at 137.1,87.195 h2.5
  text "VIN Indication" at 20.7,86.3 h2
  text "3" at 137.1,84.21 h2.5
  text "4" at 137.1,81.196 h2.5
  text "5" at 137.1,78.225 h2.5
  text "6" at 137.1,75.21 h2.5
  text "7" at 137.1,72.21 h2.5
  text "8" at 137.1,69.21 h2.5
  text "9" at 137.1,66.21 h2.5
  text "10" at 137.1,63.21 h2.5
  text "11" at 137.1,60.195 h2.5
  text "12" at 137.1,57.195 h2.5
  text "13" at 137.1,54.21 h2.5
  text "14" at 137.1,51.195 h2.5
  text "15" at 137.1,48.21 h2.5
  text "16" at 137.1,45.21 h2.5
  text "17" at 137.1,42.195 h2.5
  text "18" at 137.1,39.21 h2.5
  text "19" at 137.1,36.21 h2.5
  text "20" at 137.1,33.21 h2.5
  text "21" at 137.1,30.195 h2.5
  text "EEPROM" at 10.9,27.2 h2
  text "22" at 137.1,27.195 h2.5
  text "23" at 137.1,24.21 h2.5
  text "24" at 137.1,21.195 h2.5
  text "25" at 137.1,18.21 h2.5
  text ".GGG-.PPP-.Rev 00-" at 44.3,17.4 h3
  text "26" at 137.1,15.21 h2.5
  text "27" at 137.1,12.195 h2.5
  text "28" at 137.1,9.21 h2.5
  text "29" at 137.1,6.21 h2.5
Mechanical 1:
  the board outline again, w0.05

## Dimensions
141.141,0 to 141.141,100 on Mechanical 2
146.143,97.802 to -14.84,72.216 on Mechanical 2
141.141,100 to -14.853,72.225 on Mechanical 2
141.141,100 to 0.031,100 on Mechanical 2